# Altium PCB T35_V2.1.PcbDoc (part 4 of 5)
Units mil, origin at the board's own origin, x right, y up, seen from the top; angles counter-clockwise.
Board outline 2372.44 x 1023.62 mil, 12 copper layers (TOP, L2-G, L3, L4-G, L5, L6-V, L7-V, L8, L9-G, L10, L11-G, BOTTOM), stack 62.192 mil thick; 356 components, 288 nets, 1478 pads, 832 vias.
Unrouted connection lines stored in the file: 19.
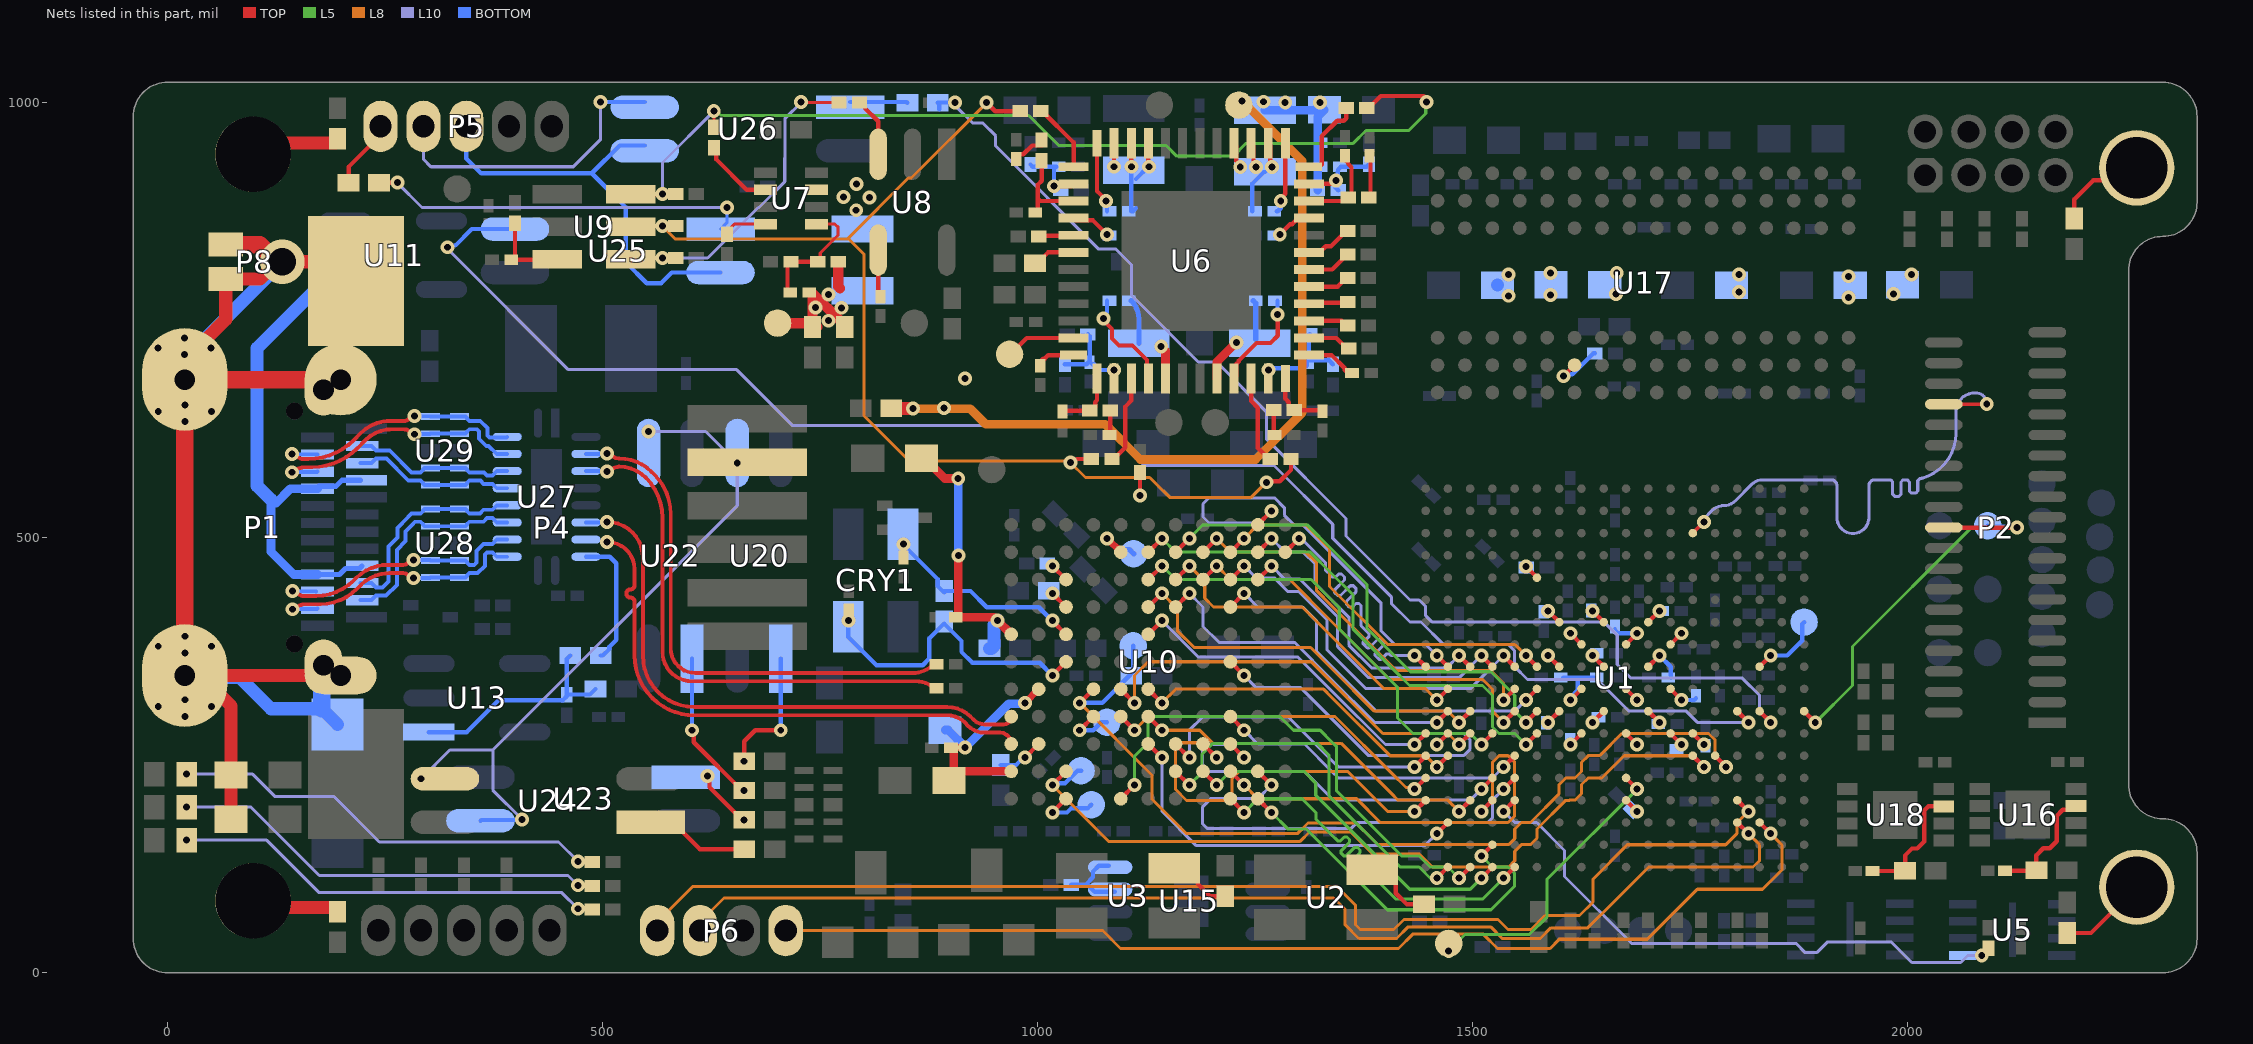
[diagram p14: the nets of this part, all layers, seen from the top]

## Via types
v1: diameter 16, hole 8, TOP to BOTTOM, tented both sides, 832 vias

## Nets (pads, with @x,y where several pads share a name; then routed paths per layer and width w, separated by ;. In a path a pad name is that pad's centre, name@x,y a point inside that pad or via, vN(x,y) a via of type N, cw(c..) or ccw(c..) an arc to the next point about the centre after c; other vN are vias at no path point) (continued)
MIPI_DCK_A_P: P2.32 U1.F3 | length 644.9
  TOP w3.6: v1@2091.3,653.54 v1(2091.3,654)
  TOP w4.2: U1.F3@1753.41,505.41 v1(1766.21,518.21) ; P2.32@2041.92,653.54 v1@2091.3,653.54
  L10 w3.6: v1@1766.21,521.56 1766.21,521.9 1775.83,531.52 cw(c1789.13,518.21) 1789.13,537.03 ccw(c1789.13,555.84) 1802.43,542.54 1821.27,561.38 ; 1821.28,561.38 cw(c1833.73,549) 1833.73,566.56 1912.59,566.56 cw(c1912.59,560.09) 1919.07,560.09 1919.07,523.29 ccw(c1937.47,523.29) 1955.87,523.29 1955.87,560.09 cw(c1962.34,560.09) 1962.34,566.56 1969.36,566.56 1980.76,566.56 1983.16,564.16 1983.16,549.96 1985.56,547.56 1990.36,547.56 1992.76,549.96 1992.76,564.16 1995.16,566.56 1999.96,566.56 2002.36,564.16 2002.36,553.79 2004.76,551.39 2009.56,551.39 2011.96,553.79 2011.96,565.53 2014.36,567.93 2014.84,567.98 ccw(c2002.62,619.94) 2016.64,568.44 ccw(c2002.62,619.94) 2056,619.94 2056,645 cw(c2077.57,645) 2077.57,666.57 2078.74,666.57 cw(c2078.74,654) v1(2091.3,654)
NetC71_1: C71.1 U6.18 | length 49.7
  TOP w5: C71.1@997.12,815.45 999.62,815.45 1012.25,828.08 U6.18@1041.61,828.08
NetC74_2: C74.2 U6.45 | length 41.3
  TOP w5: v1(1278.64,848.56) 1290.46,860.38 1292.82,860.38 1299.88,867.45 U6.45@1312.09,867.45
NetC75_2: C75.2 U6.16 | length 46.4
  TOP w5: U6.16@1041.61,867.45 1044.23,864.83 1063.89,864.83 v1(1080.16,848.56)
NetC76_2: C76.2 U6.24 | length 40.8
  TOP w5: C76.2@1003.2,700.64 1003.2,702.61 1006.61,706.01 1008.57,706.01 1012.56,710 U6.24@1039,710
NetC79_2: C79.2 U6.37 | length 54.2
  TOP w5: U6.37@1312.09,709.97 1336.1,709.97 ; 1338.1,709.97 1353.24,694.82 1353.24,692.85 1356.65,689.45 C79.2@1358.61,689.45
NetC80_1: C80.1 L1.1 U6.2 U6.3 U6.4 | length 142
  TOP w5: U6.4@1226.06,953.47 1228.68,950.85 1228.68,933.1 1233.2,928.58 v1@1233.2,925.6 ; U6.3@1245.75,953.47 1248.37,950.85 1248.37,930.71 1250.7,928.38 v1@1250.7,925.4 ; U6.2@1265.43,953.47 1267.53,951.38 1267.53,928.19 v1(1269.62,926.1)
  BOTTOM w5: C80.1@1247.14,875.32 1247.14,907.32 1260.39,920.57 L1.1@1261.64,920.57
  other v1: 1233.2,926.1 1251.5,926.1
NetC80_2: C80.2 U6.1 | length 83
  TOP w5: v1(1279.73,887) 1279.73,889.98 1285.12,895.37 U6.1@1285.12,953.47
  BOTTOM w5: C80.2@1275.14,875.32 1276.32,875.32 1279.73,878.73 v1(1279.73,887)
NetC81_2: C81.2 R34.1 R36.1 U6.47 | length 91.7
  TOP w5: U6.47@1312.09,906.82 v1@1340.19,906.82
  BOTTOM w5: R34.1@1345.66,899.57 1343.11,902.12 v1(1343.11,910.91) 1345.22,913.01 1345.22,920.93 1345.48,921.19 1345.48,923.16 1348.88,926.57 1350.85,926.57 1378.38,926.57 R36.1@1381,929.19
NetC82_1: C82.1 R35.2 | length 46.9
  TOP w5: R35.2@1380.81,891 1383,893.19 C82.1@1383,937
NetC83_1: C83.1 R35.1 U6.46 | length 102.2
  TOP w5: U6.46@1312.09,887.13 1357.13,887.13 R35.1@1359.09,889.09 ; C83.1@1352,935 1352.71,935 1357.02,930.69 1357.02,929.98 1361,926 1361,894.81 R35.1@1357.19,891 ; C83.1@1353.61,936.06 C83.1@1356.92,932.76
NetC84_1: C84.1 R37.2 | length 39
  TOP w5: C84.1@975.61,932.45 C84.1@975.61,934.42 ; C84.1@975.61,935.4 975.61,937.37 979.02,940.78 983.78,940.78 994,951 R37.2@1005,951
NetC87_1: C87.1 R37.1 U6.15 | length 105.6
  TOP w5: C87.1@1002.58,874 1000.61,874 1000.61,890.09 ; R37.1@1004.91,933.64 1004.91,910.48 1000.61,906.18 1000.61,890.09 ; U6.15@1041.61,887.13 1003.57,887.13 1000.61,890.09
NetC88_1: C88.1 L2.1 U6.9 U6.10 U6.11 | length 148.3
  TOP w5: U6.11@1087.8,949.5 1088.09,949.21 1088.09,926.68 v1(1087.91,926.5) ; v1@1107.95,930.21 U6.10@1107.95,953.47 ; v1@1127.52,926.62 1127.52,953.36 U6.9@1127.64,953.47
  BOTTOM w5: L2.1@1110.64,922.57 1108,919.92 1108,875.32 1109.97,875.32 1113.37,878.73 ; L2.1@1113.37,912.47 L2.1@1127.41,926.5
  other v1: 1108.16,926.5 1128.41,926.5
NetC88_2: C88.2 U6.12 | length 82.9
  TOP w5: U6.12@1068.58,953.47 1068.58,898.5 1079,888.09 v1(1079,887)
  BOTTOM w5: v1(1079,887) 1080,886 C88.2@1080,875.32
NetC89_2: C89.2 R38.1 R40.1 U6.14 | length 77.6
  TOP w5: v1(1019.06,904.15) 1019.8,904.15 1019.84,904.2 1039,904.2 U6.14@1041.61,906.82
  BOTTOM w5: R40.1@992,929.13 994.57,926.57 1021.48,926.57 1019.06,924.14 v1(1019.06,904.15)
NetC90_1: C90.1 R39.2 | length 28.9
  TOP w5: R39.2@1083.62,646.15 1083.62,620.34 C90.1@1085.81,618.15
NetC91_1: C91.1 R39.1 U6.25 | length 75
  TOP w5: C91.1@1028.81,648.15 1030.81,646.15 R39.1@1060,646.15 R39.1@1061.58,647.74 ; R39.1@1060,648 1063.82,648 1066.36,650.54 1066.36,655.95 1068.58,658.18 U6.25@1068.58,683
NetC92_1: C92.1 R41.2 | length 29.5
  TOP w5: C92.1@1269.61,618.15 1271.8,620.34 R41.2@1271.8,646.78
NetC93_1: C93.1 L3.1 U6.29 | length 90.5
  TOP w10: v1(1142.35,720) 1147.32,715.03 U6.29@1147.32,683
  BOTTOM w6: C93.1@1108,772.55 cw(c1087.13,751.68) 1116.64,751.68 L3.1@1116.64,723.43
NetC93_2: C93.2 U6.28 | length 111
  TOP w5: v1(1076,752.02) 1076,749.64 1085.77,739.87 1085.77,729.12 1093.89,721 1109.27,721 1125.93,704.34 1125.93,695.35 U6.28@1127.64,693.64
  BOTTOM w5: v1(1076,752.02) 1076,755 1080,759 C93.2@1080,772.55
NetC96_1: C96.1 R41.1 U6.36 | length 74.5
  TOP w5: U6.36@1285.12,683 1285.12,659.82 1289.07,655.87 1289.07,651.17 1293.46,646.78 R41.1@1295.43,646.78 1325.94,646.78 C96.1@1327.61,648.45
NetC97_2: C97.2 R42.1 R44.1 U6.26 | length 96.9
  BOTTOM w5: R42.1@1031.48,699.53 1056.59,699.53 C97.2@1060,702.94 ; R44.1@1052.11,732.89 R44.1@1054,731 ; R44.1@1058.11,733.89 1060,732 1060,704.69 C97.2@1060,702.94 ; v1(1088.27,692.85) 1071.83,692.85 1065.37,699.31 1063.41,699.31 1060,702.72 C97.2@1060,702.94
NetC98_1: C98.1 L4.1 U6.32 | length 96.5
  TOP w10: U6.32@1206.38,683 1206.5,683.12 1206.5,702.22 v1(1228.68,724.41)
  BOTTOM w6: C98.1@1248,772.55 1248.09,772.55 1251,769.64 L4.1@1251,728
NetC98_2: C98.2 U6.33 | length 118.5
  TOP w5: U6.33@1226.06,683 1228.68,685.62 1228.68,699.67 1231.61,702.61 1231.61,703.76 1251.85,724 1268,724 1276.23,732.23 v1(1276.23,756.75)
  BOTTOM w5: v1@1276,758 C98.2@1276,772.55
NetC101_2: C101.2 R45.1 R46.1 U6.35 | length 111.4
  BOTTOM w5: v1(1265.43,692.85) 1267.54,694.96 1273.82,694.96 1273.86,695 1301,695 1302.67,696.67 1308.59,696.67 1310,698.08 C101.2@1310,704 ; C101.2@1312,704.69 1312,733.39 R46.1@1312.91,734.29 ; C101.2@1313,704 1335.21,704 1339.6,699.61 R45.1@1339.6,699.26
NetC102_1: C102.1 U8.4 | length 51.7
  TOP w5: U8.4@817.04,830.66 817.04,782.69 C102.1@819.71,780.02
NetC103_2: C103.2 R54.1 R56.2 U7.5 | length 146.5
  TOP w3.5: U7.5@745.94,860.56 767.44,860.56 771,857 771,848 750.4,827.4 750.4,816.4 R54.1@748,814
  TOP w5: C103.2@712.81,782 712.81,813.31 R56.2@716.81,817.31 R54.1@747.33,817.31
NetC107_1: C107.1 R52.2 U9.3 | length 93
  TOP w5: R52.2@399.52,861.75 399.52,821.07 398.01,819.57 447.35,819.57 U9.3@447.95,820.16
NetC116_1: C116.1 R66.1 R67.2 U13.1 | length 259.7
  BOTTOM w5: U13.1@300.51,276.61 344.06,276.61 380.9,313.45 454.61,313.45 459,317.84 R67.2@459,319.81 ; R66.1@463,364.66 459,360.66 R67.2@459,319.81 ; C116.1@492,326.24 485.57,319.81 R67.2@459,319.81
NetC118_2: C118.2 CRY1.3 R74.1 U10.C6 | length 356.4
  TOP w5: v1(783,404.73) C118.2@783,413.43 ; v1(1017.17,341.74) U10.C6@1032.92,357.49
  BOTTOM w5: CRY1.3@782.5,397.85 782.5,386.04 815,353.54 868.19,353.54 875.8,361.15 875.8,384.37 892.78,401.35 912.7,381.42 912.7,368.86 925.32,356.24 1002.67,356.24 v1(1017.17,341.74)
NetC121_1: C121.1 CRY1.1 R74.2 U10.C7 | length 258.6
  TOP w5: v1@845.57,486.14 845.57,492.09 v1(846.09,492.61) ; v1@846,492 846.14,491.86 846.14,477.3 C121.1@846.2,477.25 ; v1(1017.17,404.73) U10.C7@1032.92,388.99
  BOTTOM w5: CRY1.1@845.65,492.18 885.28,452.56 885.28,444.62 892.78,437.12 R74.2@892.78,438.85 923.1,438.85 941.71,420.23 1001.67,420.23 v1(1017.17,404.73)
NetL5_1: L5.1 U7.7
  other v1: 791.75,876.54 776.89,891.66 806.88,891.4 792.01,906.53
NetLED1_1: LED1.1 R98.2 | length 511.6
  TOP w5: v1(472.04,127.86) 472.33,127.58 488.21,127.58 R98.2@488.5,127.29
  L10 w3.5: v1@18.75,228.35 97.99,228.35 123.91,202.43 191.57,202.43 243.57,150.43 449.48,150.43 v1(472.04,127.86)
  other v1: 22.15,228.35
NetLED2_1: LED2.1 R99.2 | length 507
  TOP w5: v1(471.81,100.57) 472.09,100.28 487.97,100.28 R99.2@488.26,100
  L10 w3.5: v1@18.75,190.41 96.06,190.41 174.6,111.86 460.52,111.86 v1(471.81,100.57)
  other v1: 22.15,190.41
NetLED3_1: LED3.1 R100.2 | length 502.5
  TOP w5: v1(471.84,73.57) 472.13,73.28 488.01,73.28 R100.2@488.3,73
  L10 w3.5: v1@18.75,152.46 113.98,152.46 174.37,92.07 453.34,92.07 v1(471.84,73.57)
  other v1: 22.15,152.46
NetP1_A4: P1.A4 P1.A9 P1.B4 P1.B9 U11.1 | length 598.1
  BOTTOM w6: P1.B4@171.59,557.2 173.59,559.2 193.73,559.2 200.67,566.14 P1.A9@221.87,566.14 ; P1.B9@172.49,457.87 197.59,457.87 204.53,464.81 220.76,464.81 P1.A4@223.67,467.72
  BOTTOM w10: 119,543.8 119,484 145.13,457.87 P1.B9@172.49,457.87 ; 125,540 141.3,556.3 P1.B4@172.49,556.3
  BOTTOM w15: 119,543.8 103,559.8 103,717.89 170.69,785.57 U11.1@204.76,785.57
NetPAD1_1: PAD1.1 R96.2 | length 105.9
  TOP w15: PAD1.1@98.43,940.94 111.25,953.77 193,953.77 195.5,956.27 R96.2@195.5,958.77
NetPAD2_1: PAD2.1 R97.2 | length 103.7
  TOP w15: PAD2.1@98.43,82.68 106,75.11 193,75.11 195.5,72.61 R97.2@195.5,70.11
NetPAD3_1: PAD3.1 R86.2 | length 108.8
  TOP w5: R86.2@2192,867 2192,888.98 2213.93,910.91 2249.49,910.91 PAD3.1@2263.78,925.2
NetPAD4_1: PAD4.1 R87.2 | length 101.9
  TOP w5: R87.2@2183.66,45.79 2211.14,45.79 PAD4.1@2263.78,98.43
NetR1_1: R1.1 U2.3 | length 82.9
  TOP w5: U2.3@1384.94,118.5 1396.75,118.5 1411.97,103.28 1411.97,91.47 1424.88,78.56 R1.1@1444.35,78.56
NetR2_1: R2.1 U3.3 | length 73.8
  TOP w5: U3.3@1157.15,120.22 1168.96,120.22 1184.18,105 1184.18,102.32 1198.5,88 R2.1@1216,88
NetR25_2: R25.2 U6.39 | length 45.1
  TOP w5: U6.39@1314.09,749.34 1349.84,749.34 1355.02,744.15 R25.2@1356.99,744.15
NetR26_2: R26.2 U6.48 | length 97
  TOP w5: U6.48@1312.09,926.5 1324.29,926.5 1326.91,929.12 1326.91,961.75 1344.6,979.44 1352.26,979.44 1355.19,982.37 R26.2@1355.19,994
NetR27_1: R27.1 U6.42 | length 50.4
  TOP w5: U6.42@1314.09,808.39 1338.91,808.39 1350.45,819.93 1350.45,821.06 1354.84,825.45 R27.1@1356.8,825.45
NetR28_2: R28.2 U6.13 | length 80.8
  TOP w5: R28.2@1003.72,990.45 1005.69,990.45 1041.61,954.52 U6.13@1041.61,926.5
NetR29_1: R29.1 U6.43 | length 52.8
  TOP w5: U6.43@1312.09,828.08 1324.29,828.08 1331.36,835.15 1335.53,835.15 ; 1337.53,835.15 1354.84,852.45 R29.1@1356.8,852.45
NetR30_2: R30.2 U6.27 | length 102.8
  TOP w5: R30.2@1085.75,590.58 1087.72,590.58 1101.19,604.05 1101.19,651 1107.95,657.77 U6.27@1107.95,683
NetR31_1: R31.1 U6.41 | length 46.8
  TOP w5: U6.41@1314.09,788.71 1345.09,788.71 1354.84,798.45 R31.1@1356.8,798.45
NetR32_2: R32.2 U6.34 | length 102.7
  TOP w5: U6.34@1245.75,683 1245.75,657.25 1253.39,649.61 1253.39,603.19 1265.95,590.64 R32.2@1267.91,590.64
NetR33_1: R33.1 U6.38 | length 48.8
  TOP w5: U6.38@1314.09,729.65 1343.63,729.65 1355.84,717.45 R33.1@1357.8,717.45
NetR43_2: R43.2 U6.17 | length 40.4
  TOP w5: R43.2@1001.72,846.45 1002.38,847.11 1040.96,847.11 U6.17@1041.61,847.76
NetR50_2: R50.2 U7.2 | length 85.7
  TOP w5: R50.2@628,948.19 631.04,945.15 631.04,934.87 665.97,899.93 U7.2@687.68,899.93
NetR51_2: R51.2 U8.3 | length 69.3
  TOP w5: R51.2@795.56,1000.18 797.53,1000.18 801.92,995.79 801.92,993.82 817.04,978.7 U8.3@817.04,940.9
NetR55_2: R55.2 U7.4 | length 44.7
  TOP w3.5: R55.2@646,855 647.22,855 648.14,855.92 648.14,857.14 651.56,860.56 U7.4@687.68,860.56
NetR57_2: R57.2 U10.C9 | length 22.3
  TOP w5: v1(1017.17,467.73) U10.C9@1032.92,451.98
NetR61_1: R61.1 U10.B3 | length 53.4
  TOP w5: v1(985.68,247.25) U10.B3@1001.42,263
  BOTTOM w5: R61.1@958.05,238.91 975.55,238.91 983.89,247.25 v1(985.68,247.25)
NetR62_1: R62.1 U10.C8 | length 22.3
  TOP w5: v1(1017.17,436.23) U10.C8@1032.92,420.48
NetR66_2: R66.2 U27.9 | length 153
  BOTTOM w5: U27.9@481.12,478.23 508.49,478.23 516,470.73 516,382.66 508,374.66 508,372.16 500.5,364.66 R66.2@498,364.66
NetR70_1: R70.1 U15.7 U15.8 | length 93.3
  BOTTOM w5: R70.1@1038.81,101 1055.17,101 ; U15.8@1082,123 1070.57,123 1063.9,116.32 1063.9,109.73 1055.17,101 ; U15.7@1089,93 1065.74,93 1057.74,101 1055.17,101
NetR75_1: R75.1 SJ2.2 U16.7 | length 139.7
  TOP w5: SJ2.2@2112.41,117.16 2147.9,117.16 R75.1@2148.37,117.64 2148.37,135.14 2156.38,143.15 2163.69,143.15 2171.7,151.16 2171.7,180.27 2178.71,187.28 2189.54,187.28 U16.7@2193.93,191.67
NetR82_1: R82.1 U17.L8 | length 65.2
  TOP w5: v1(1604.72,685.72) U17.L8@1617.51,698.52
  BOTTOM w5: v1(1604.72,685.72) 1606.82,687.83 1614.76,687.83 1638.93,712 R82.1@1640.9,712
NetR83_1: R83.1 U1.N5 | length 18.1
  TOP w5: v1(1561.48,467.02) U1.N5@1574.28,454.23
NetR88_1: R88.1 SJ1.2 U18.7 | length 143.4
  TOP w5: SJ1.2@1960.06,117.02 1997.09,117.02 R88.1@1997.44,117.37 1997.44,134.87 2005.45,142.88 2011.39,142.88 2019.41,150.89 2019.41,186.41 2024.4,191.4 U18.7@2041.63,191.4
NetR89_1: R89.1 U20.1 | length 152.7
  TOP w5: v1(663,243.15) 663,266.15 675.6,278.75 v1(705,278.75)
  BOTTOM w5: v1(705,278.75) U20.1@705,361.24
NetR90_1: R90.1 U22.1 | length 178.1
  TOP w5: v1(602.98,278.75) 605.08,276.65 605.08,264.9 660.5,209.48 v1(663,209.48)
  BOTTOM w5: v1(602.98,278.75) U22.1@602.98,361.24
NetR91_1: R91.1 U23.1 | length 69
  TOP w5: v1(621,226) 623.1,223.9 623.1,213.21 660.5,175.81 v1(663,175.81)
NetR92_1: R92.1 U24.1 | length 120.9
  TOP w5: U24.1@555.02,172.73 U24.1@555.28,173 581.15,173 612.01,142.15 R92.1@663,142.15
NetR94_1: R94.1 U25.1 | length 439.4
  TOP w5: R94.1@243.21,908.21 v1(264.25,908.21)
  L10 w3.5: v1(264.25,908.21) 292.66,879.8 v1(643,879.8)
  BOTTOM w3.5: U25.1@635.77,854.9 643,862.13 v1(643,879.8)
NetR95_1: R95.1 U26.1 | length 65.9
  BOTTOM w5: U26.1@785,1001 849.74,1001 R95.1@850.56,1000.18
NetT9_1: T9.1 U6.23 | length 81.3
  TOP w5: T9.1@968,711 969,711 987.65,729.65 U6.23@1041.61,729.65
NSTATUS: T8.1 U1.J14 | length 337
  TOP w5: U1.J14@1676.64,223.91 v1(1689.43,211.12)
  L5 w3.5: v1(1472.83,25.25) 1491.53,43.95 1565.42,43.95 1586.02,64.55 1586.02,82.02 1586.02,107.7 v1(1689.43,211.12)
PCLK: U1.U12 U10.J6 | length 398.8
  TOP w5: U10.J6@1221.9,357.49 v1(1237.64,341.74) ; v1(1459.12,262.3) U1.U12@1471.91,275.09
  L10 w3.5: v1(1237.64,341.74) 1251.74,327.65 1302.68,327.65 1380.82,249.5 1489.94,249.5 1497.46,257.02 1497.46,267.58 1489.99,275.05 1471.87,275.05 v1(1459.12,262.3)
PLLIN0: T6.1 U1.C9 | length 83.5
  TOP w5: U1.C9@1830.18,351.87 v1(1842.98,364.66)
  BOTTOM w5: v1(1842.98,364.66) 1861.98,364.66 1879.28,381.96 1879.28,400.97 T6.1@1881.36,403.05
POWER_ON_1: R26.1 R47.1 R50.1 U9.6 | length 1143.4
  TOP w3.5: R50.1@628,971.81 v1(628,990.45)
  TOP w5: U9.6@532.59,894.97 v1(569,894.97) R47.1@584.13,894.97 ; R26.1@1378.81,994 1380.78,994 1394.71,1007.93 1444.31,1007.93 1444.31,1006.91 1447.24,1003.98 v1(1447.24,1001)
  L5 w3.5: v1(628,990.45) 631.28,990.45 636.3,985.43 990,985.43 1024.43,951 1148.06,951 1160.34,938.72 1225.07,938.72 1239.82,953.47 1363,953.47 1377.75,968.22 1426.89,968.22 1446.42,987.75 1446.42,1000.18 v1(1447.24,1001)
  L10 w3.5: v1(569,894.97) 569,931.45 v1(628,990.45) ; v1@1447.24,1000.81 v1(1447.24,1001)
POWER_ON_2: R28.1 R30.1 R32.1 R48.1 U9.5 | length 1279.6
  TOP w5: v1(941.71,1000.18) 951.44,990.45 R28.1@980.1,990.45 ; v1(1037.94,586.66) 1040.92,586.66 1044.83,590.58 R30.1@1062.13,590.58 ; v1(1263.18,563.82) 1264.36,565 1278.68,565 1291.54,577.86 R32.1@1291.54,590.64
  L8 w3.5: v1(569,858.27) 583.72,843.55 781.54,843.55 783,845.01 ; v1(941.71,1000.18) 855.13,913.6 851.59,913.6 783,845.01 ; v1(1263.18,563.82) 1245.81,546.46 1152.07,546.46 1136.2,562.32 1136.06,562.32 1128.99,569.39 1055.21,569.39 v1(1037.94,586.66) 1036.42,588.18 852.61,588.18 800.9,639.9 800.9,825.65 783,843.55 783,845.01
POWER_ON_3: R49.1 R51.1 U9.4 | length 373.4
  TOP w3.5: v1(728.19,1001) 729.01,1000.18 R51.1@771.94,1000.18
  TOP w5: U9.4@532.59,820.16 533.99,821.57 v1(569,821.57) R49.1@584.13,821.57
  L10 w3.5: v1(569,821.57) 621,821.57 679.23,879.8 680.01,879.8 709.61,909.39 709.61,936.73 709.71,936.84 709.71,981.71 v1@729,1001 ; v1(728.19,1001) v1@728.59,1000.59
RX1_N: P1.B10 U27.13 U28.3 U28.6 | length 310
  TOP w4.5: v1(143.66,438.85) cw(c143.66,432.48) 148.16,436.98 ccw(c157.54,446.36) 157.54,433.1 170.98,433.1 ccw(c170.98,494.14) 214.14,450.97 216.96,453.79 cw(c253.32,417.44) 241.47,467.47 cw(c253.32,417.44) 253.32,468.85 270.55,468.85 ccw(c270.55,478.67) 277.49,471.73 278.5,472.74 cw(c283,468.24) v1(283,474.6)
  BOTTOM w4.5: v1(143.66,438.85) 143.99,438.52 170.36,438.52 P1.B10@170.69,438.19 ; v1(283,474.6) 283.33,474.27 301.94,474.27 U28.6@302.27,473.94 U28.3@335.73,473.94 342.62,473.94 344.31,472.26 344.31,471.49 346.95,468.85 352.65,468.85 355.29,471.49 355.29,484.62 363.49,492.82 373.45,492.82 378.54,497.92 U27.13@390.57,497.92
RX1_P: P1.B11 U27.12 U28.4 U28.5 | length 312
  TOP w4.5: v1(143.66,417.85) ccw(c143.66,424.21) 148.16,419.71 cw(c157.54,410.33) 157.54,423.6 174.92,423.6 ccw(c174.92,484.64) 175.77,423.6 ccw(c174.92,484.64) 218.08,441.47 222.29,445.69 cw(c255.29,412.69) 245.82,458.38 cw(c255.29,412.69) 255.29,459.35 270.55,459.35 cw(c270.55,449.54) 277.49,456.48 278.5,455.47 ccw(c283,459.97) v1(283,453.6)
  BOTTOM w4.5: v1(143.66,417.85) 143.99,418.18 172.16,418.18 P1.B11@172.49,418.5 ; v1(283,453.6) 283.33,453.93 301.94,453.93 U28.5@302.27,454.26 U28.4@335.73,454.26 342.62,454.26 344.31,455.95 344.31,456.72 346.95,459.35 356.59,459.35 364.79,467.55 364.79,480.69 367.42,483.32 373.45,483.32 378.54,478.23 U27.12@390.57,478.23
RX2_N: P1.A10 U27.16 U29.4 U29.5 | length 190
  BOTTOM w4.5: P1.A10@221.87,585.83 234.67,585.83 239.76,590.92 251.64,590.92 276.83,565.72 291.05,565.72 293.69,563.09 293.69,562.32 295.38,560.63 U29.5@302.27,560.63 U29.4@335.73,560.63 342.62,560.63 344.31,562.32 344.31,563.09 346.95,565.72 359.83,565.72 363.49,562.06 373.45,562.06 378.54,556.97 U27.16@390.57,556.97
RX2_P: P1.A11 U27.17 U29.3 U29.6 | length 190
  BOTTOM w4.5: P1.A11@221.87,605.51 234.67,605.51 239.76,600.42 255.57,600.42 280.77,575.22 291.05,575.22 293.69,577.86 293.69,578.63 295.38,580.31 U29.6@302.27,580.31 U29.3@335.73,580.31 342.62,580.31 344.31,578.63 344.31,577.86 346.95,575.22 363.77,575.22 367.42,571.56 373.45,571.56 378.54,576.66 U27.17@390.57,576.66
SS_N: R7.2 U1.P15 U5.1 | length 682.3
  TOP w5: v1(1535.89,185.53) U1.P15@1548.69,198.32 ; v1(2085.58,19.81) 2093.46,27.69 R7.2@2093.46,28.24
  L10 w3.5: v1(1535.89,185.53) 1548.64,172.78 1573.86,172.78 1606,140.63 1606,110.71 1682.94,33.77 1871.95,33.77 1882.58,23.14 1895.8,23.14 1907.83,35.17 1981.77,35.17 2005.19,11.75 2061.27,11.75 2069.32,19.81 v1(2085.58,19.81)
SSRX_N: U10.A3 U27.8 | length 645
  TOP w4.5: v1(505.34,495.26) cw(c505.34,463.6) 505.98,495.25 cw(c505.34,463.6) 537,463.6 537,445.46 cw(c532.25,445.46) 532.25,440.71 ccw(c532.25,435.96) 532.25,431.21 cw(c532.25,426.46) 537,426.46 537,424.21 537,364.66 ccw(c605.66,364.66) 546.97,329.03 ccw(c605.66,364.66) 570.03,305.97 ccw(c605.66,364.66) 605.66,296 896.19,296 cw(c896.19,266.99) 916.71,287.5 920.48,283.73 ccw(c939.06,302.31) 939.06,276.04 956.89,276.04 cw(c956.89,263) U10.A3@969.93,263
SSRX_P: U10.A4 U27.7 | length 672.9
  TOP w4.5: v1@508.45,518.26 v1(505.34,518.26) cw(c505.34,477.1) 546.5,477.1 546.5,364.66 ccw(c605.66,364.66) 554.53,334.91 ccw(c605.66,364.66) 575.91,313.53 ccw(c605.66,364.66) 605.66,305.5 896.23,305.5 cw(c896.23,267.08) 923.4,294.25 927.17,290.47 ccw(c939.09,302.39) 939.09,285.54 960.97,285.54 ccw(c960.97,294.5) U10.A4@969.93,294.5
  BOTTOM w4.49: U27.7@481.12,517.6 504.69,517.6 v1(505.34,518.26)
SSTX_N: C111.2 U27.3 | length 612.6
  TOP w4.5: v1(505.34,597) cw(c505.34,590.64) 509.84,595.14 ccw(c519.22,604.52) 519.22,591.25 519.36,591.25 cw(c519.36,538.56) 556.62,575.82 559.41,573.03 cw(c513.32,526.94) 578.5,526.94 578.5,373 ccw(c606.91,373) 606.91,344.59 856.56,344.59 ccw(c856.56,379.16) 863.25,345.25 ccw(c856.56,379.16) C111.2@881,354.72
  BOTTOM w4.5: U27.3@481.12,596.34 505.34,596.34 v1@506,597
SSTX_P: C113.2 U27.4 | length 613.3
  TOP w4.5: v1(505.34,576) ccw(c505.34,582.36) v1@509.84,577.86 ; v1@509.86,577.88 cw(c519.22,568.48) 519.22,581.75 cw(c519.22,538.23) 549.98,569.02 ; 550,569 cw(c504.12,523.12) 550.03,568.97 cw(c504.12,523.12) 569,523.12 569,369.07 ccw(c602.98,369.07) 574.28,350.88 ccw(c602.98,369.07) 584.78,340.37 ccw(c602.98,369.07) 602.98,335.09 861.46,335.09 cw(c861.46,307.46) 863.77,335 cw(c861.46,307.46) C113.2@881,327
  BOTTOM w4.5: U27.4@481.12,576.66 505.34,576.66 v1@506,576
SYNC: R24.2 U6.40 | length 43.8
  TOP w5: U6.40@1312.09,769.02 U6.40@1313.15,770.09 ; U6.40@1315.15,770.09 1355.93,770.09 R24.2@1356.99,771.15
TEC_EN: P2.20 T28.1 U1.A11 | length 488.5
  TOP w5: U1.A11@1881.36,300.69 v1(1894.16,287.89) ; P2.20@2041.92,511.81 2042.02,511.72 2125.91,511.72 v1(2126,511.62)
  L5 w3.5: v1(1894.16,287.89) 1894.61,287.89 1936.95,330.23 1936.95,375.15 2073.42,511.62 v1(2126,511.62)
  BOTTOM w5: T28.1@2092.4,513.92 2093.55,512.77 2126.23,512.77 v1@2127,512
TEST_N: R8.2 U1.J15 | length 18.1
  TOP w5: U1.J15@1676.64,198.32 v1(1689.43,185.53)
TRIG_GND1: P5.3 U25.2 U26.3 | length 505.1
  BOTTOM w5: P5.3@343.43,973 343.43,936.09 360.52,918.99 487.8,918.99 ; U26.3@548.72,951 519.81,951 487.8,918.99 ; U25.2@635.77,804.9 579.81,804.9 567.43,792.52 550.91,792.52 527,816.43 527,879.8 487.8,918.99
TRIG_GND2: P4.2 U20.3 U22.3 U23.3 U24.3 | length 801.3
  L10 w3.5: v1(291.57,223) 324.57,256 374,256 ; v1(407.56,176.34) 374,209.9 374,256 ; v1(552.98,622.14) 618.69,622.14 v1(655,585.83) 655,537 374,256
  BOTTOM w5: U23.3@359.78,174.86 360.52,175.6 406.82,175.6 v1(407.56,176.34)
TRIG_IN: P5.5 R94.2 | length 80
  TOP w5: R94.2@208.21,908.21 208.21,926.37 245,963.16 P5.5@245,973
TRIG_IN_IO: R93.2 U1.D11 U25.4 | length 1902
  TOP w5: v1(1118,548.83) R93.2@1118,573.08 ; U1.D11@1804.59,300.69 v1(1817.39,287.89)
  L10 w3.5: v1(322,834) 322,832.11 460.85,693.27 654.25,693.27 718.63,628.89 1077.14,628.89 1123,583.03 ; v1(1118,548.83) 1118,578.03 1123.04,583.07 1271.88,583.07 1339.5,515.45 1339.5,499.5 1406.8,432.2 1406.8,424.54 1428.25,403.09 1441.04,403.09 1466.67,377.47 1541.11,377.47 1548.71,369.88 1548.71,351.84 1563.35,337.2 1643.44,337.2 1680.01,300.64 1745.9,300.64 1758.65,287.89 v1(1817.39,287.89)
  BOTTOM w5: 331,836.1 349.8,854.9 U25.4@399.49,854.9
TRIG_OUT: P5.4 U26.4 | length 361.9
  L10 w3.5: P5.4@294.21,973 294.21,935.01 302.72,926.5 466.54,926.5 498,957.97 v1(498,1001)
  BOTTOM w5: P5.4@294.21,963.16 P5.4@294.21,973 ; v1(498,1001) U26.4@548.72,1001
TRIG_OUT_IO: R95.2 U1.C11 | length 1380.4
  TOP w5: U1.C11@1830.18,300.69 v1(1842.98,287.89)
  L5 w5: v1@1843,287.91 v1@1843,293.39
  L10 w3.5: v1(905.17,1000.43) 905.17,997.19 925.35,977 937,977 952,962 952,950.35 1070.55,831.8 1090.4,831.8 1108,814.2 1108,779.01 1185.04,701.97 1206.18,701.97 1263.18,644.97 1263.18,613.84 1354.8,522.22 1354.8,502.12 1428.34,428.59 1438.81,428.59 1446.37,421.03 1446.37,410.56 1453.93,403 1651.55,403 1666.57,387.99 1666.57,354.39 1681.89,339.07 1809.83,339.07 1830.23,318.67 1830.23,300.64 v1(1842.98,287.89)
  BOTTOM w5: R95.2@887.17,992.43 887.17,998.57 R95.2@885.56,1000.18 885.81,1000.43 v1(905.17,1000.43)
TX1_N: P1.A3 U27.15 U28.1 U28.8 | length 245.2
  BOTTOM w4.49: 269,516 272.19,519.19
  BOTTOM w4.5: P1.A3@221.87,448.03 234.67,448.03 239.76,442.94 247.32,442.94 254.22,449.84 254.22,490.08 264.25,500.11 264.25,511.25 269,516 ; 272.19,519.19 272.19,519.34 280.76,527.91 291.05,527.91 293.69,530.54 293.69,531.31 295.38,533 U28.8@302.27,533 U28.1@335.73,533 342.62,533 344.31,531.31 344.31,530.54 346.95,527.91 359.2,527.91 363.49,532.19 373.45,532.19 378.54,537.29 U27.15@390.57,537.29
TX1_P: P1.A2 U27.14 U28.2 U28.7 | length 245.2
  BOTTOM w4.5: P1.A2@221.87,428.35 234.67,428.35 239.76,433.44 251.26,433.44 263.72,445.9 263.72,486.14 273.75,496.18 273.75,507.32 276.12,509.69 281.69,515.25 281.69,515.4 284.69,518.41 291.05,518.41 293.69,515.77 293.69,515 295.38,513.31 U28.7@302.27,513.31 U28.2@335.73,513.31 342.62,513.31 344.31,515 344.31,515.77 346.95,518.41 363.14,518.41 367.42,522.69 373.45,522.69 378.54,517.6 U27.14@390.57,517.6
TX2_N: P1.B3 U27.18 U29.2 U29.7 | length 313.1
  TOP w4.5: v1(143,575.33) ccw(c143,581.69) 147.5,577.19 cw(c156.88,567.81) 156.88,581.08 165.5,581.08 ccw(c165.5,655.68) 166.44,581.08 ccw(c165.5,655.68) 218.25,602.93 227.54,612.22 cw(c257.86,581.91) 252.43,624.43 cw(c257.86,581.91) 257.86,624.78 271.55,624.78 cw(c271.55,614.96) 278.49,621.9 279.5,620.89 ccw(c284,625.39) v1(284,619.03)
  BOTTOM w4.5: v1(143,575.33) 143.33,575.66 172.16,575.66 P1.B3@172.49,575.98 ; v1(284,619.03) 284.33,619.36 301.94,619.36 U29.7@302.27,619.69 U29.2@335.73,619.69 342.62,619.69 344.31,621.37 344.31,622.14 346.95,624.78 355.66,624.78 358.29,622.14 358.29,613.83 366.49,605.62 369.28,605.62 378.56,596.34 U27.18@390.57,596.34
TX2_P: P1.B2 U27.19 U29.1 U29.8 | length 309.4
  TOP w4.5: v1(143,596.33) cw(c143,589.96) 147.5,594.46 ccw(c156.88,603.84) 156.88,590.58 161.56,590.58 ccw(c161.56,665.18) 214.32,612.43 222.22,620.33 cw(c255.89,586.66) 248.22,633.66 cw(c255.89,586.66) 255.89,634.28 271.55,634.28 ccw(c271.55,644.09) 278.49,637.15 279.5,638.16 cw(c284,633.66) v1(284,640.03)
  BOTTOM w4.5: v1(143,596.33) 143.33,596 172.16,596 P1.B2@172.49,595.67 ; v1(284,640.03) 284.33,639.7 301.94,639.7 U29.8@302.27,639.37 U29.1@335.73,639.37 342.62,639.37 344.31,637.68 344.31,636.91 346.95,634.28 359.59,634.28 367.79,626.08 367.79,617.76 370.43,615.12 389.66,615.12 U27.19@390.57,616.03
UART_CTS: T17.1 U10.C1 | length 70.8
  TOP w5: v1(1017.17,184.26) U10.C1@1032.92,200.01
  BOTTOM w5: v1(1017.17,184.26) 1034.07,184.26 1038.75,188.95 1057.74,188.95 T17.1@1062,193.21
UART_RTS: T16.1 U10.D4 | length 57.4
  TOP w5: v1(1048.67,278.75) U10.D4@1064.42,294.5
  BOTTOM w5: v1(1048.67,278.75) 1064.17,278.75 1073.31,287.89 T16.1@1080,287.89
UART_RX_FPGA: P6.3 U1.D16 | length 1371.3
  TOP w5: U1.D16@1804.59,172.73 v1(1817.39,159.94)
  L8 w3.5: P6.3@612.21,48.5 612.21,58.34 639.87,86 1340.6,86 1353.8,72.8 1353.8,55.2 1369.51,39.49 1412.83,39.49 1426.17,52.84 1520.98,52.84 1534.33,39.49 1578.09,39.49 1590.2,51.6 1632.8,51.6 1663.22,82.02 1702.71,121.51 1822.58,121.51 1830.23,129.16 1830.23,147.1 v1(1817.39,159.94)
UART_RX_FX3: R69.2 T19.1 U1.E13 U10.D5 | length 1078.2
  TOP w5: v1(1048.67,310.25) U10.D5@1064.42,325.99 ; U1.E13@1779,249.5 v1(1791.8,236.71)
  L8 w3.5: v1(1048.67,310.25) 1131.57,227.34 1131.57,199.85 1171.48,159.94 1298.86,159.94 1311.06,172.14 1366.55,172.14 1391.51,147.19 1541.72,147.19 1548.73,154.19 1548.73,165.22 1556.29,172.78 1566.76,172.78 1599.86,205.87 1599.86,216.34 1607.44,223.93 1617.91,223.93 1625.44,231.46 1625.44,241.93 1633.06,249.55 1646.37,249.55 1671.87,275.05 1771.49,275.05 1779.05,267.49 1779.05,249.46 v1(1791.8,236.71)
  BOTTOM w5: v1(1048.67,310.25) 1074.46,310.25 R69.2@1106.75,342.53 ; R69.2@1109,345 1110.17,346.17 T19.1@1110.17,375.86
UART_TX_FPGA: P6.1 U1.C16 | length 1269.7
  TOP w5: U1.C16@1830.18,172.73 v1(1842.98,159.94)
  L8 w3.5: P6.1@710.64,48.5 1075.07,48.5 1095.57,28 1415,28 1431.34,44.34 1512.55,44.34 1528.89,28 1589.4,28 1599.91,38.51 1701.13,38.51 1758.62,96.01 1833.61,96.01 1855.82,118.22 1855.82,147.1 v1(1842.98,159.94)
UART_TX_FX3: T18.1 U1.F13 U10.C2 | length 954.2
  TOP w5: v1(1017.17,215.76) U10.C2@1032.92,231.51 ; U1.F13@1753.41,249.5 v1(1766.21,236.71)
  L8 w3.5: v1(1017.17,215.76) 1081.84,151.09 1302.04,151.09 1312.79,161.84 1360.16,161.84 1385.79,136.21 1439.22,136.21 1453.84,121.6 1541.72,121.6 1548.73,128.6 1548.73,139.63 1556.29,147.19 1566.76,147.19 1574.27,154.7 1574.27,165.17 1607.38,198.28 1611.57,198.28 1611.66,198.37 1617.94,198.37 1625.41,205.84 1625.41,216.31 1633.06,223.96 1648.75,223.96 1674.25,249.46 1753.46,249.46 v1(1766.21,236.71)
  BOTTOM w5: v1(1017.17,215.76) 1019.28,217.86 1031.72,217.86 1046.03,232.17 T18.1@1050.29,232.17
UD0: U1.N12 U10.F10 | length 600.9
  TOP w5: U10.F10@1127.41,483.47 v1(1143.16,499.22) ; v1(1561.48,262.3) U1.N12@1574.28,275.09
  L5 w3.5: v1(1143.16,499.22) 1158.9,483.47 1313.78,483.47 1338.2,459.06 1363,434.25 1363,395 1406.8,351.2 1427.77,330.23 1511.58,330.23 1523.14,318.67 1523.14,282.61 1530.7,275.05 1548.73,275.05 v1(1561.48,262.3)
UD1: U1.R12 U10.F9 | length 527.7
  TOP w5: U10.F9@1127.41,451.98 v1(1143.16,467.73) ; v1(1510.3,262.3) U1.R12@1523.09,275.09
  L5 w3.5: v1(1143.16,467.73) 1158.9,451.98 1314.7,451.98 1338.2,428.48 1347,419.68 1347,395.2 1406.8,335.4 1414,328.2 1414,292.75 1431.7,275.05 1497.55,275.05 v1(1510.3,262.3)
UD2: U1.V12 U10.F7 | length 389.7
  TOP w5: U10.F7@1127.41,388.99 v1(1143.16,404.73) ; v1(1433.53,262.3) U1.V12@1446.32,275.09
  L10 w3.5: v1(1143.16,404.73) 1184.89,363 1299.4,363 1338.2,324.21 1400.1,262.3 1406.8,262.3 v1(1433.53,262.3)
UD3: U1.N11 U10.G10 | length 567.8
  TOP w5: U10.G10@1158.9,483.47 v1(1174.65,499.22) ; v1(1561.48,287.89) U1.N11@1574.28,300.69
  L5 w3.5: v1(1174.65,499.22) 1190.4,514.97 1310.28,514.97 1338.2,487.06 1379,446.25 1379,396 1406.8,368.2 1429,346 1521.4,346 1548.73,318.67 1548.73,300.64 v1(1561.48,287.89)
UD4: U1.U10 U10.G9 | length 400.1
  TOP w5: U10.G9@1158.9,451.98 v1(1174.65,467.73) ; v1(1459.12,313.48) U1.U10@1471.91,326.28
  L8 w3.5: v1(1174.65,467.73) 1192.4,449.98 1192.4,430.53 1202.45,420.48 1221.9,420.48 1304.38,420.48 1338.2,386.66 1397.86,327 1406.8,327 1445.6,327 v1(1459.12,313.48)
UD5: U1.T11 U10.F8 | length 458.2
  TOP w5: U10.F8@1127.41,420.48 v1(1143.16,436.23) ; v1(1484.71,287.89) U1.T11@1497.5,300.69
  L8 w3.5: v1(1143.16,436.23) 1160.9,418.48 1160.9,393.15 1180.21,373.84 1314.16,373.84 1338.2,349.8 1387.36,300.64 1406.8,300.64 1471.96,300.64 v1(1484.71,287.89)
UD6: U1.P10 U10.H10 | length 477.1
  TOP w5: U10.H10@1190.4,483.47 v1(1206.15,499.22) ; v1(1535.89,313.48) U1.P10@1548.69,326.28
  L8 w3.5: v1(1206.15,499.22) 1221.9,483.47 1308.51,483.47 1321,470.98 1321,439 1338.2,421.81 1406.8,353.2 1412.58,347.42 1521.29,347.42 1535.89,332.82 v1(1535.89,313.48)
UD7: U1.P11 U10.H9 | length 459.4
  TOP w5: U10.H9@1190.4,451.98 v1(1206.15,467.73) ; v1(1535.89,287.89) U1.P11@1548.69,300.69
  L8 w3.5: v1(1206.15,467.73) 1221.9,451.98 1290.02,451.98 1338.2,403.8 1405,337 1512,337 1523.14,325.86 1523.14,300.64 v1(1535.89,287.89)
UD8: U1.N9 U10.J10 | length 458.5
  TOP w5: U10.J10@1221.9,483.47 v1(1237.64,499.22) ; v1(1561.48,364.66) U1.N9@1574.28,351.87
  L8 w3.5: v1(1237.64,499.22) 1253.39,514.97 1308.51,514.97 1336,487.48 1336,444 1338.2,441.8 1402.5,377.5 1406.8,377.5 1548.64,377.5 v1(1561.48,364.66)
UD9: U1.P9 U10.J9 | length 432.8
  TOP w5: U10.J9@1221.9,451.98 v1(1237.64,467.73) ; v1(1535.89,364.66) U1.P9@1548.69,351.87
  L10 w3.5: v1(1237.64,467.73) 1251.39,453.98 1272.28,453.98 1288.13,438.13 1300.7,438.13 1333,405.83 1333,371.2 1338.2,366 1377.2,327 1406.8,327 1498.23,327 v1(1535.89,364.66)
UD10: U1.U9 U10.K11 | length 513.1
  TOP w5: U10.K11@1253.39,514.97 v1(1269.14,530.72) ; v1(1459.12,364.66) U1.U9@1471.91,351.87
  L10 w3.5: v1(1269.14,530.72) 1255.39,516.97 1197.23,516.97 1190.4,523.8 1190.4,539 1197.06,545.66 1272.94,545.66 1283.94,534.66 1283.94,525.99 1294.96,514.97 1305.03,514.97 1395.2,424.8 1395.2,392.8 1410.5,377.5 1438.81,377.5 1438.85,377.55 1441.75,377.55 1441.85,377.46 1446.32,377.46 v1(1459.12,364.66)
UD11: U1.V9 U10.L10 | length 367.5
  TOP w5: U10.L10@1284.89,483.47 v1(1300.64,499.22) ; v1(1433.53,364.66) U1.V9@1446.32,351.87
  L10 w3.5: v1(1300.64,499.22) 1303.37,499.22 1331,471.59 1331,463.2 1338.2,456 1339.43,454.77 1342.79,454.77 1346.32,458.3 1349.68,458.3 1353.04,454.94 1353.04,451.58 1341.81,440.35 1341.81,437 1345.17,433.64 1348.53,433.64 1359.76,444.86 1363.12,444.86 1366.48,441.5 1366.48,438.15 1355.25,426.92 1355.25,423.56 1358.61,420.2 1361.97,420.2 1366.3,424.54 1369.66,424.54 1372,422.2 1372,399 1376.1,394.9 1381.31,389.69 1381.31,386.79 1374.58,380.06 1374.58,378.04 1379.28,373.34 1381.29,373.34 1390.96,383 1392.97,383 1397.68,378.3 1397.68,376.29 1388.11,366.72 1388.11,364.7 1392.81,360 1394.82,360 1401.46,366.64 1404.36,366.64 1405.6,365.4 1406.34,364.66 v1(1433.53,364.66)
UD12: U1.T9 U10.K10 | length 355.3
  TOP w5: U10.K10@1253.39,483.47 v1(1269.14,499.22) ; v1(1484.71,364.66) U1.T9@1497.5,351.87
  L10 w3.5: v1(1269.14,499.22) 1284.89,483.47 1305.53,483.47 1319,470 1319,447.78 1358,408.79 1358,376.6 1384.11,350.49 1406.8,350.49 1470.54,350.49 v1(1484.71,364.66)
UD13: U1.R9 U10.K9 | length 365.4
  TOP w5: U10.K9@1253.39,451.98 v1(1269.14,467.73) ; v1(1510.3,364.66) U1.R9@1523.09,351.87
  L10 w3.5: v1(1269.14,467.73) 1284.43,452.43 1301.79,452.43 1338.2,416.02 1345,409.22 1345,374.8 1380.52,339.28 1406.8,339.28 1484.92,339.28 v1(1510.3,364.66)
UD14: U1.N10 U10.J8 | length 446
  TOP w5: U10.J8@1221.9,420.48 v1(1237.64,436.23) ; v1(1561.48,313.48) U1.N10@1574.28,326.28
  L10 w3.5: v1(1237.64,436.23) 1253.39,420.48 1304.87,420.48 1320.68,404.68 1320.68,369.92 1338.2,352.4 1389.91,300.69 1406.8,300.69 1548.69,300.69 v1(1561.48,313.48)
UD15: U1.U11 U10.G8 | length 399.4
  TOP w5: U10.G8@1158.9,420.48 v1(1174.65,436.23) ; v1(1459.12,287.89) U1.U11@1471.91,300.69
  L10 w3.5: v1(1174.65,436.23) 1188.75,422.13 1190.4,420.48 1190.4,398.12 1208.72,379.8 1295.6,379.8 1338.2,337.2 1387.51,287.89 1406.8,287.89 v1(1459.12,287.89)
UD16: U1.P14 U10.K2 | length 528.1
  TOP w5: U10.K2@1253.39,231.51 v1(1269.14,215.76) ; v1(1535.89,211.12) U1.P14@1548.69,223.91
  L10 w3.5: v1(1269.14,215.76) 1253.83,200.45 1199.69,200.45 1190.01,190.77 1190.01,170.98 1194.99,166 1360.76,166 1367.54,172.78 1517.78,172.78 1523,178 1523,180.2 1523.05,180.25 1523.05,198.23 ; 1523.02,198.25 v1(1535.89,211.12)
UD17: U1.P13 U10.J4 | length 366.6
  TOP w5: U10.J4@1221.9,294.5 v1(1237.64,278.75) ; v1(1535.89,236.71) U1.P13@1548.69,249.5
  L10 w3.5: v1(1237.64,278.75) 1253.39,263 1307,263 1338.2,231.8 1346.04,223.96 1406.8,223.96 1523.14,223.96 v1(1535.89,236.71)
UD18: U1.R17 U10.K1 | length 440.3
  TOP w5: U10.K1@1253.39,200.01 v1(1269.14,184.26) ; v1(1510.3,134.35) U1.R17@1523.09,147.14
  L5 w3.5: v1(1269.14,184.26) 1288.27,165.13 1309.38,165.13 1327.8,146.7 1402.08,72.42 1521.4,72.42 1548.64,99.66 1548.64,114.04 1541.08,121.6 1523.05,121.6 v1(1510.3,134.35)
  L10 w3.5: v1(1269.14,184.26) v1@1270.34,185.46
UD19: U1.R15 U10.J2 | length 527.5
  TOP w5: U10.J2@1221.9,231.51 v1(1237.64,215.76) ; v1(1510.3,185.53) U1.R15@1523.09,198.32
  L8 w3.5: v1(1237.64,215.76) 1253.39,200.01 1366.99,200.01 1394.22,172.78 1541.17,172.78 1548.64,180.25 1548.64,241.99 1541.17,249.46 1530.61,249.46 1523.14,241.99 1523.14,198.37 v1(1510.3,185.53)
UD20: U1.R14 U10.J3 | length 456.5
  TOP w5: U10.J3@1221.9,263 v1(1237.64,247.25) ; v1(1510.3,211.12) U1.R14@1523.09,223.91
  L10 w3.5: v1(1237.64,247.25) 1222.6,262.3 1196.3,262.3 1190,256 1190,238.56 1197.05,231.51 1307.14,231.51 1340.28,198.37 1497.55,198.37 v1(1510.3,211.12)
UD21: U1.P18 U10.J1 | length 516.6
  TOP w5: U10.J1@1221.9,200.01 v1(1237.64,184.26) ; v1(1535.89,108.76) U1.P18@1548.69,121.55
  L5 w3.5: v1(1237.64,184.26) 1253.39,200.01 1304.33,200.01 1306.32,198.01 ; 1306.33,198.01 1314.39,189.96 1320.07,184.26 1320.07,176.7 1338.2,158.58 1339.08,157.7 1344,152.78 1345.24,151.54 1348.24,151.54 1352.84,156.14 1355.84,156.14 1358.85,153.13 1358.85,150.12 1349.13,140.4 1349.13,137.4 1352.13,134.39 1355.14,134.39 1364.86,144.11 1367.86,144.11 1370.87,141.11 1370.87,138.1 1361.15,128.38 1361.15,125.38 1364.15,122.37 1367.16,122.37 1376.88,132.09 1379.89,132.09 1382.89,129.09 1382.89,126.08 1373.17,116.36 1373.17,113.36 1376.17,110.35 1379.18,110.35 1388.9,120.07 1391.91,120.07 1394.91,117.07 1394.91,114.06 1390.32,109.47 1390.32,106.46 1393.77,103.01 1396.21,100.57 1406.8,89.98 1411.77,85.01 1512.15,85.01 v1(1535.89,108.76)
UD22: U1.R18 U10.H2 | length 420.6
  TOP w5: U10.H2@1190.4,231.51 v1(1206.15,215.76) ; v1(1510.3,108.76) U1.R18@1523.09,121.55
  L5 w3.5: v1(1206.15,215.76) 1221.9,231.51 1306.49,231.51 1320,218 1320,204 1428,96 ; 1428.13,96.13 1428.25,96.01 1497.55,96.01 v1(1510.3,108.76)
UD23: U1.V15 U10.H3 | length 467.9
  TOP w5: U10.H3@1190.4,263 v1(1206.15,247.25) ; v1(1433.53,185.53) U1.V15@1446.32,198.32
  L8 w3.5: v1(1206.15,247.25) 1189.02,264.38 1164.28,264.38 1158.9,259 1158.9,210.59 1171.48,198.01 1215.24,198.01 1223.89,206.66 1223.89,223.32 1232.08,231.51 1356.49,231.51 1402.47,185.53 v1(1433.53,185.53)
UD24: U1.T15 U10.F4 | length 420.5
  TOP w5: U10.F4@1127.41,294.5 v1(1143.16,278.75) ; v1(1484.71,185.53) U1.T15@1497.5,198.32
  L8 w3.5: v1(1143.16,278.75) 1186.7,278.75 1201.66,263.79 1338.2,263.79 1349.21,263.79 1406.8,206.2 1414.63,198.37 1471.87,198.37 v1(1484.71,185.53)
UD25: U1.U18 U10.G2 | length 443.5
  TOP w5: U10.G2@1158.9,231.51 v1(1174.65,215.76) ; v1(1459.12,108.76) U1.U18@1471.91,121.55
  L5 w3.5: v1(1174.65,215.76) 1189.35,230.46 1189.35,251.48 1201.66,263.79 1321.68,263.79 1335.04,250.43 1335.04,203.61 1417.14,121.51 1438.81,121.51 1453,107.31 v1@1453,107
UD26: U1.V13 U10.G3 | length 360.9
  TOP w5: U10.G3@1158.9,263 v1(1174.65,247.25) ; v1(1433.53,236.71) U1.V13@1446.32,249.5
  L10 w3.5: v1(1174.65,247.25) 1174.65,278.75 1190.01,294.11 1288.49,294.11 1338.2,244.4 1345.89,236.71 1406.8,236.71 v1(1433.53,236.71)
UD27: U1.U16 U10.F3 | length 439.9
  TOP w5: U10.F3@1127.41,263 v1(1143.16,247.25) ; v1(1459.12,159.94) U1.U16@1471.91,172.73
  L10 w3.5: v1(1143.16,247.25) 1143.16,185.44 1182.16,146.44 1445.62,146.44 v1(1459.12,159.94)
UD28: U1.U13 U10.F5 | length 399.8
  TOP w5: U10.F5@1127.41,325.99 v1(1143.16,310.25) ; v1(1459.12,236.71) U1.U13@1471.91,249.5
  L8 w3.5: v1(1143.16,310.25) 1158.9,325.99 1329.01,325.99 1338.2,316.8 1405.54,249.46 1446.37,249.46 v1(1459.12,236.71)
UD29: U1.T18 U10.E1 | length 586.3
  TOP w5: U10.E1@1095.91,200.01 v1(1111.66,215.76) ; v1(1484.71,108.76) U1.T18@1497.5,121.55
  L5 w3.5: v1(1111.66,215.76) 1111.66,248.94 1127.41,264.69 1127.41,288.87 1133.04,294.5 1278.64,294.5 1294.39,278.75 1325.05,278.75 1338.2,265.61 1344,259.8 1344,209 1406.8,146.2 1418.68,134.32 1438.68,134.32 1451.49,121.51 1471.96,121.51 v1(1484.71,108.76)
UD30: U1.T12 U10.E5 | length 490.9
  TOP w5: U10.E5@1095.91,325.99 v1(1111.66,310.25) ; v1(1484.71,262.3) U1.T12@1497.5,275.09
  L8 w3.5: v1(1111.66,310.25) 1111.66,341.74 1127.41,357.49 1314.65,357.49 1397.09,275.05 1471.96,275.05 v1(1484.71,262.3)
UD31: U1.V14 U10.E4 | length 403.3
  TOP w5: U10.E4@1095.91,294.5 v1(1111.66,278.75) ; v1(1433.53,211.12) U1.V14@1446.32,223.91
  L8 w3.5: v1(1111.66,278.75) 1127.41,294.5 1338.2,294.5 1342.18,294.5 1406.8,229.89 1423.68,213.01 1431.64,213.01 v1(1433.53,211.12)
USB_RESET: P6.4 U1.D15 | length 1421.1
  TOP w5: U1.D15@1804.59,198.32 v1(1817.39,185.53)
  L8 w3.5: P6.4@563,48.5 563,58.34 603.66,99 1344.37,99 1365.77,77.6 1365.77,55.25 1371.28,49.74 1409.74,49.74 1421.34,61.34 1529.48,61.34 1541.08,49.74 1567.32,49.74 1583.38,65.8 1623.2,65.8 1638.59,81.19 1638.59,107.59 1678.14,147.14 1791.2,147.14 1804,159.94 1804,172.14 v1(1817.39,185.53)
USBType-C-SHELL: C114.2 FB6.2 P1.SH1 P1.SH2 P1.SH3 P1.SH4 P4. P8.0 R58.1 | length 1659
  TOP w15: P1.SH1@19.93,341.73 P1.SH1@38.03,341.73 ; P1.SH4@28.86,681.89 P1.SH4@41.94,694.97 ; P1.SH4@41.94,726.04 67,751.11 P8.0@67,797.63 106.5,797.63 126.18,817.31 P8.0@132,817.31 194.76,817.31 P4.@216.8,795.28 ; R58.1@73,176.34 FB6.2@73,227.34 73,306.77 P1.SH1@38.03,341.73 ; P1.SH2@199.06,341.73 P1.SH1@38.03,341.73
  TOP w20: P1.SH1@19.93,341.73 P1.SH4@19.93,680.09 ; P1.SH4@28.86,681.89 P1.SH3@199.06,681.89 ; P8.0@67,837 105.88,837 125.57,817.31 P8.0@126.18,817.31 ; P1.SH3@170.23,677.43 P1.SH3@177.58,670.08
  BOTTOM w15: P1.SH4@18.13,681.89 P1.SH4@19.93,681.89 27.65,681.89 40.73,694.97 40.73,726.04 P8.0@132,817.31 ; P1.SH1@19.93,341.73 22.06,339.6 82.86,339.6 119,303.46 177.58,303.46 C114.2@195.5,285.54 ; P1.SH2@171.18,347.15 P1.SH2@177.58,353.54
  BOTTOM w20: C114.2@177.58,303.46 P1.SH2@177.58,353.54
VBATT: T20.1 U10.E10 | length 60
  TOP w8: v1(1080.16,499.22) U10.E10@1095.91,483.47
  BOTTOM w6: v1(1080.16,499.22) 1092.89,486.49 1105.77,486.49 T20.1@1110.64,481.61
VCC1V0: C103.1 C105.1 L5.2 R54.2 R77.2 T14.1 | length 168.1
  TOP w11.81: T14.1@701.41,746.74 C105.1@741.47,746.74 ; C105.1@747.33,742.24 742.83,746.74 C105.1@741.47,746.74 ; R54.2@770.95,817.31 770.95,789.05 773,787 ; R77.2@778.42,742.24 778.42,744.74 774.32,748.83 773.98,748.83 741.47,781.34 C105.1@741.47,746.74
  other v1: 759.75,749.54 744.89,764.66 774.88,764.4 760.01,779.53
VCC1V0A_PLL: C122.2 C123.2 FB7.2 U10.A7 | length 317.1
  TOP w10: FB7.2@867.02,591.36 870.27,591.36 893.5,568.13 v1(909,568.13) ; v1(909.17,479.47) 909.17,408.66 950.25,408.66 v1(954.18,404.73) U10.A7@969.93,388.99
  BOTTOM w10: v1(909,568.13) 909,479.64 v1(909.17,479.47)
  BOTTOM w15: C122.2@944.97,373 947.47,373 949.97,375.5 949.97,400.25 954.18,404.46 v1(954.18,404.73)
VCC1V0A_USB: C124.2 C125.2 FB8.2 U10.A2 U10.B5 | length 277.7
  TOP w8: C125.2@900.77,258.75 900.89,258.87 917.13,258.87 v1@918,258 ; C125.2@904,258 C125.2@904.13,257.87 ; v1(985.68,310.25) U10.B5@1001.42,325.99
  TOP w10: C124.2@898.99,220.51 C124.2@898.5,221 903.72,226.22 C125.2@903.72,258.75 ; C124.2@898.99,231.51 U10.A2@969.93,231.51
  BOTTOM w6: v1@918,256 v1@918,258
  BOTTOM w10: FB8.2@894,279 897.25,279 917,259.25 v1(917,259) ; v1@915,259 v1@915.17,259.17 ; v1@917,257 v1(917,259) ; v1@918,258 v1@918,258.25 ; v1@986,310 985.1,309.1 967.1,309.1 v1(917,259)
VCC1V2: C5.1 C6.1 C7.1 C8.1 C9.1 C10.1 C11.1 C12.1 C13.1 C14.1 C15.1 C16.1 C17.1 C18.1 C77.2 C78.1 C81.1 FB1.1 FB2.1 FB3.1 FB4.1 FB5.1 L1.2 R34.2 R76.2 T10.1 U1.G8 U1.G10 U1.G12 U1.H7 U1.H9 U1.H11 U1.J8 U1.J10 U1.J12 U1.K7 U1.K9 U1.K11 U1.L8 U1.L10 U1.L12 U1.M7 U1.M9 U1.M11 | length 1537.1
  TOP w5: v1(1587.07,287.89) U1.M11@1599.87,300.69 ; v1(1587.07,364.66) U1.M9@1599.87,351.87 ; v1(1587.07,415.84) U1.M7@1599.87,403.05 ; v1(1612.66,262.3) U1.L12@1625.46,275.09 ; v1(1612.66,313.48) U1.L10@1625.46,326.28 ; v1(1612.66,390.25) U1.L8@1625.46,377.46 ; v1(1638.25,287.89) U1.K11@1651.05,300.69 ; v1(1638.25,364.66) U1.K9@1651.05,351.87 ; v1(1638.25,415.84) U1.K7@1651.05,403.05 ; U1.J12@1676.64,275.09 v1(1689.43,262.3) ; U1.J10@1676.64,326.28 v1(1689.43,313.48) ; U1.J8@1676.64,377.46 v1(1689.43,390.25) ; U1.H11@1702.23,300.69 v1(1715.02,287.89) ; U1.H9@1702.23,351.87 v1(1715.02,364.66) ; U1.H7@1702.23,403.05 v1(1715.02,415.84) ; U1.G12@1727.82,275.09 v1(1740.61,262.3) ; U1.G10@1727.82,326.28 v1(1740.61,313.48) ; U1.G8@1727.82,377.46 v1(1740.61,390.25)
  TOP w15: R76.2@832,649 832.36,648.64 856.69,648.64 v1(856.88,648.45)
  L8 w10: v1(856.88,648.45) 922.76,648.45 940.7,630.5 1077.94,630.5 1118.49,589.95 1250.65,589.95 1304.38,643.68 1304.38,933.07 v1(1235.15,1002.3)
  BOTTOM w5: C9.1@1604.4,339.28 1621.22,339.28 ; v1(1612.66,313.48) 1612.66,316.46 1621.22,325.01 1621.22,339.28 ; C16.1@1640,339.28 1638.03,339.28 1621.22,339.28 ; C14.1@1664,395 1664,393.66 1667.41,390.25 v1(1689.43,390.25) ; v1(1715.02,364.66) 1728,351.69 C6.1@1728,339.28 ; v1(1740.61,313.48) 1755,313.48 C8.1@1757,315.48
  BOTTOM w9.84: L1.2@1261.64,991.43 C78.1@1329.52,991.43 ; R34.2@1322.04,899.57 1322.04,983.96 C78.1@1329.52,991.43 ; C78.1@1330,991.92 C78.1@1329.52,991.43
  BOTTOM w15: FB4.1@1528.8,790.4 FB4.1@1529.05,790.65
  other v1: 892.78,649 917,683 1932.47,776.28 1541.72,778.2 1589.97,779.18 1983.98,780.28 1806.49,782.61 1932.47,800.62 1541.72,802.45 1806.49,802.45 2004.76,802.45 1589.97,804.6 1284.89,1000.18 1325.05,1000.18 1260.02,1001.24
VCC1V2_BL: C30.1 FB3.2 U1.F12 | length 18.1
  TOP w5: U1.F12@1753.41,275.09 v1(1766.21,262.3)
  other v1: 1665,780.28 1666,804.6